# Altium PCB PCB4.PcbDoc
Units mm, origin at the board's own origin, x right, y up, seen from the top; angles counter-clockwise.
Board outline 40 x 40 mm, 2 copper layers (Top Layer, Bottom Layer); 13 components, 21 nets, 53 pads, 13 vias.
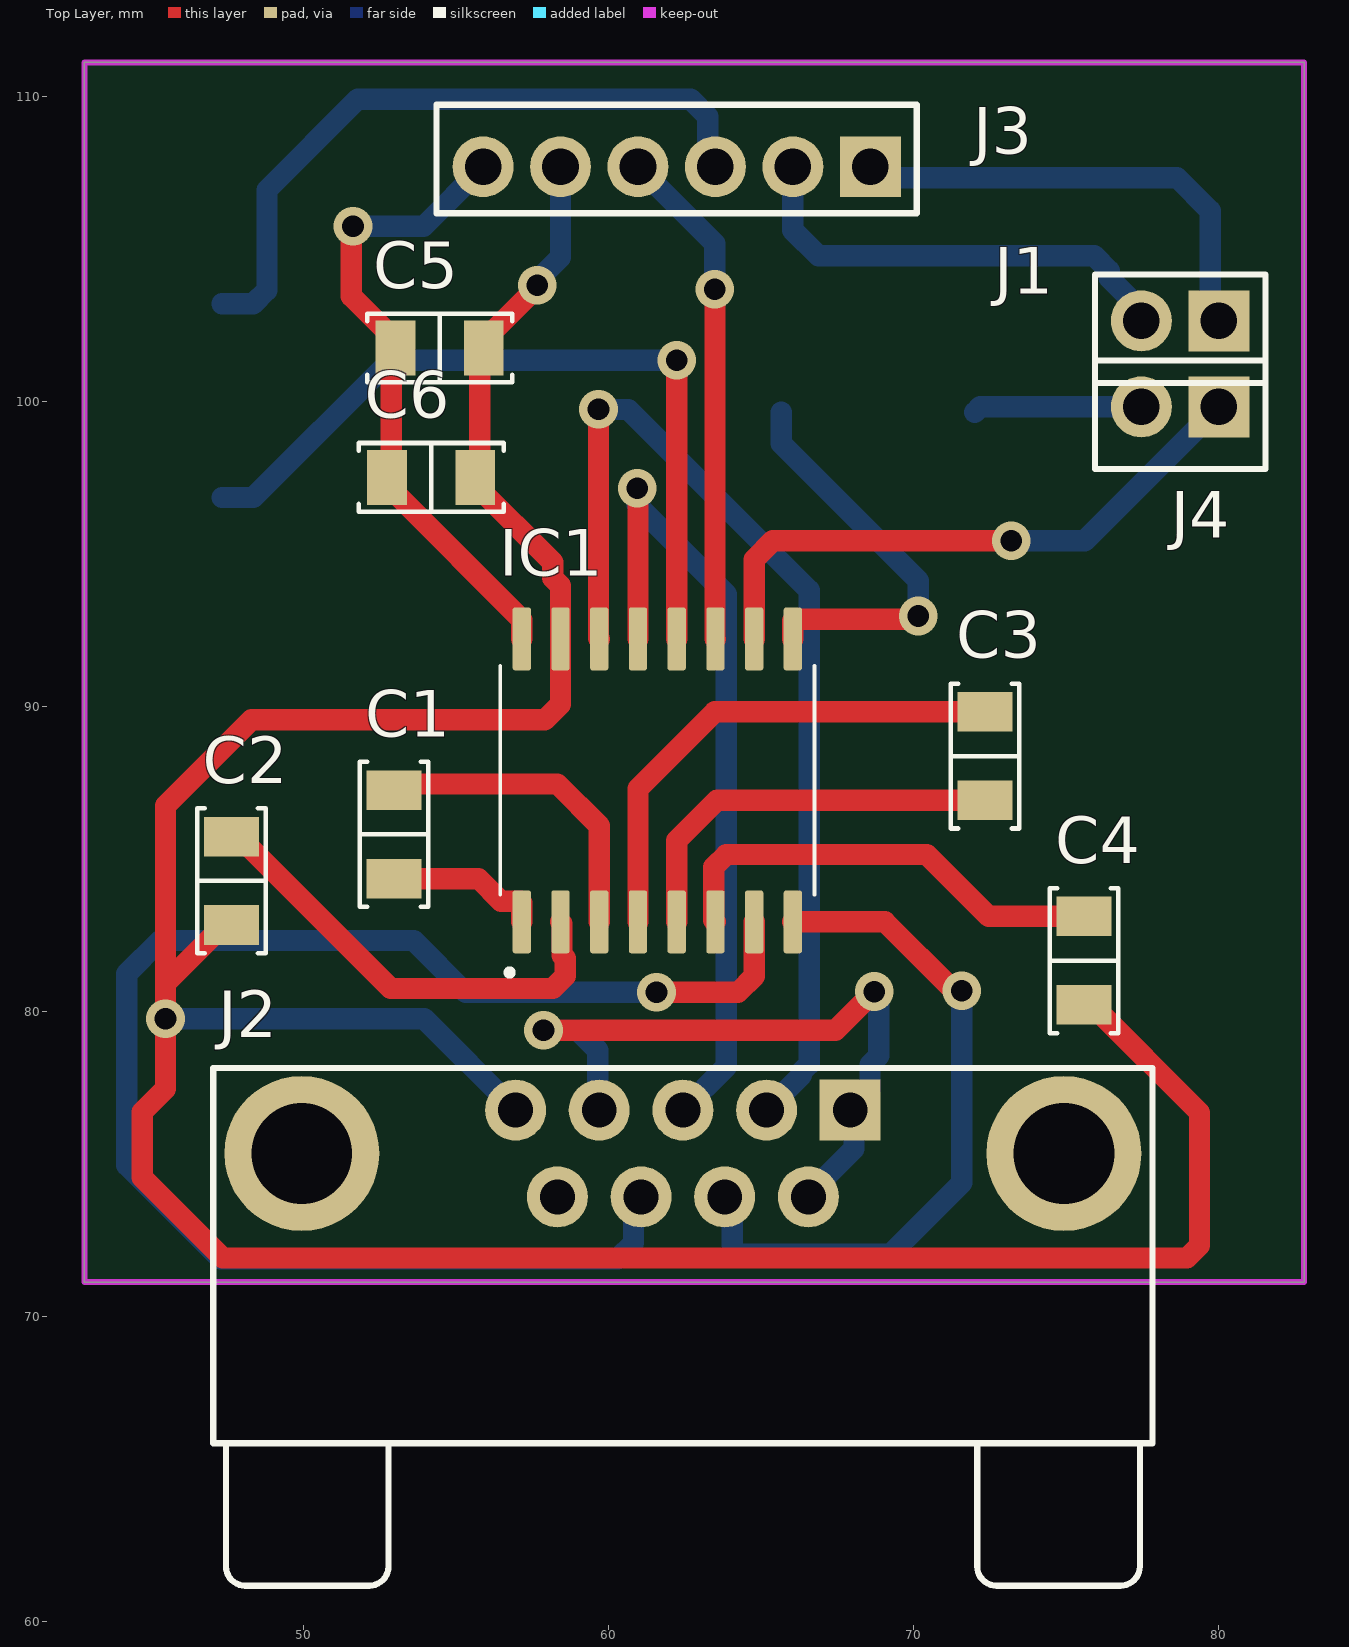
[diagram p0: Top Layer view]
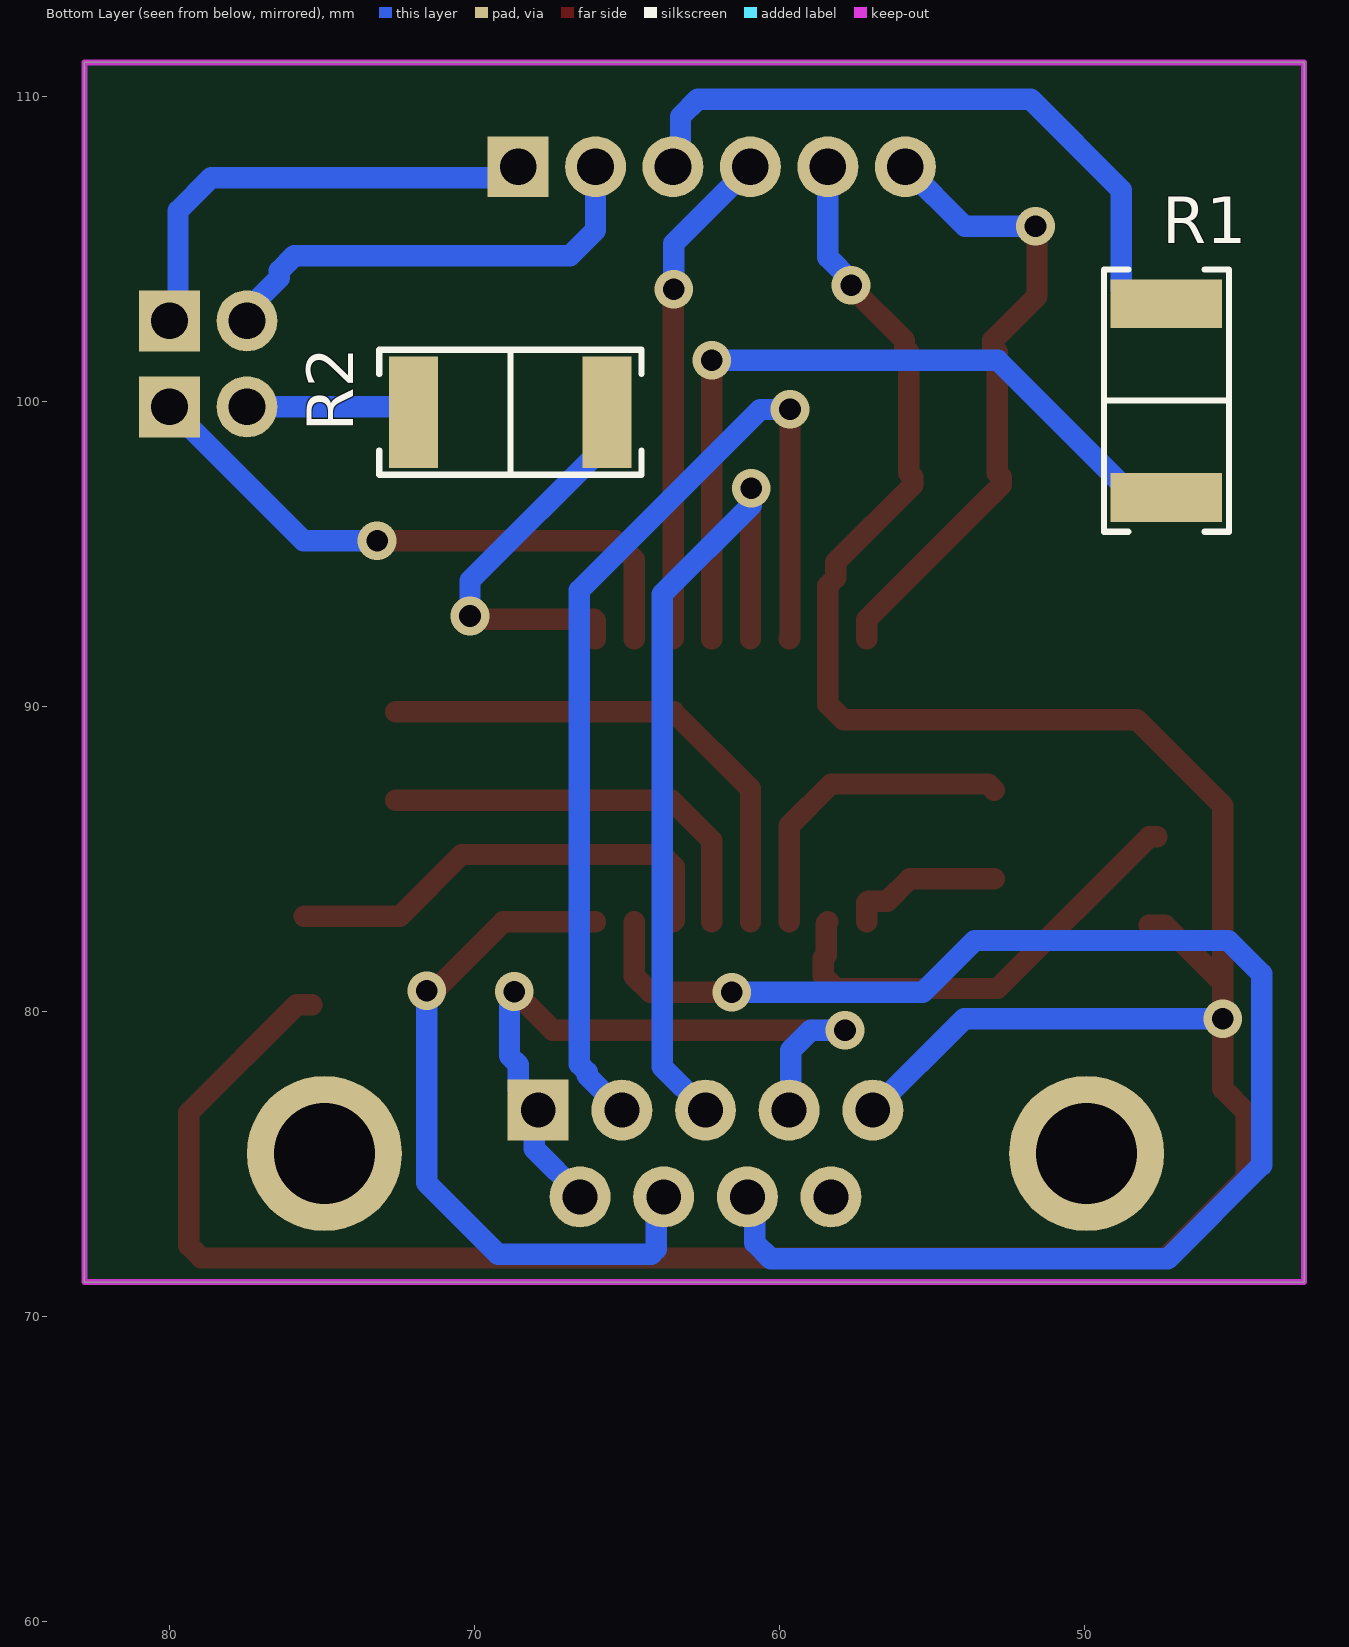
[diagram p1: Bottom Layer view, seen from below]
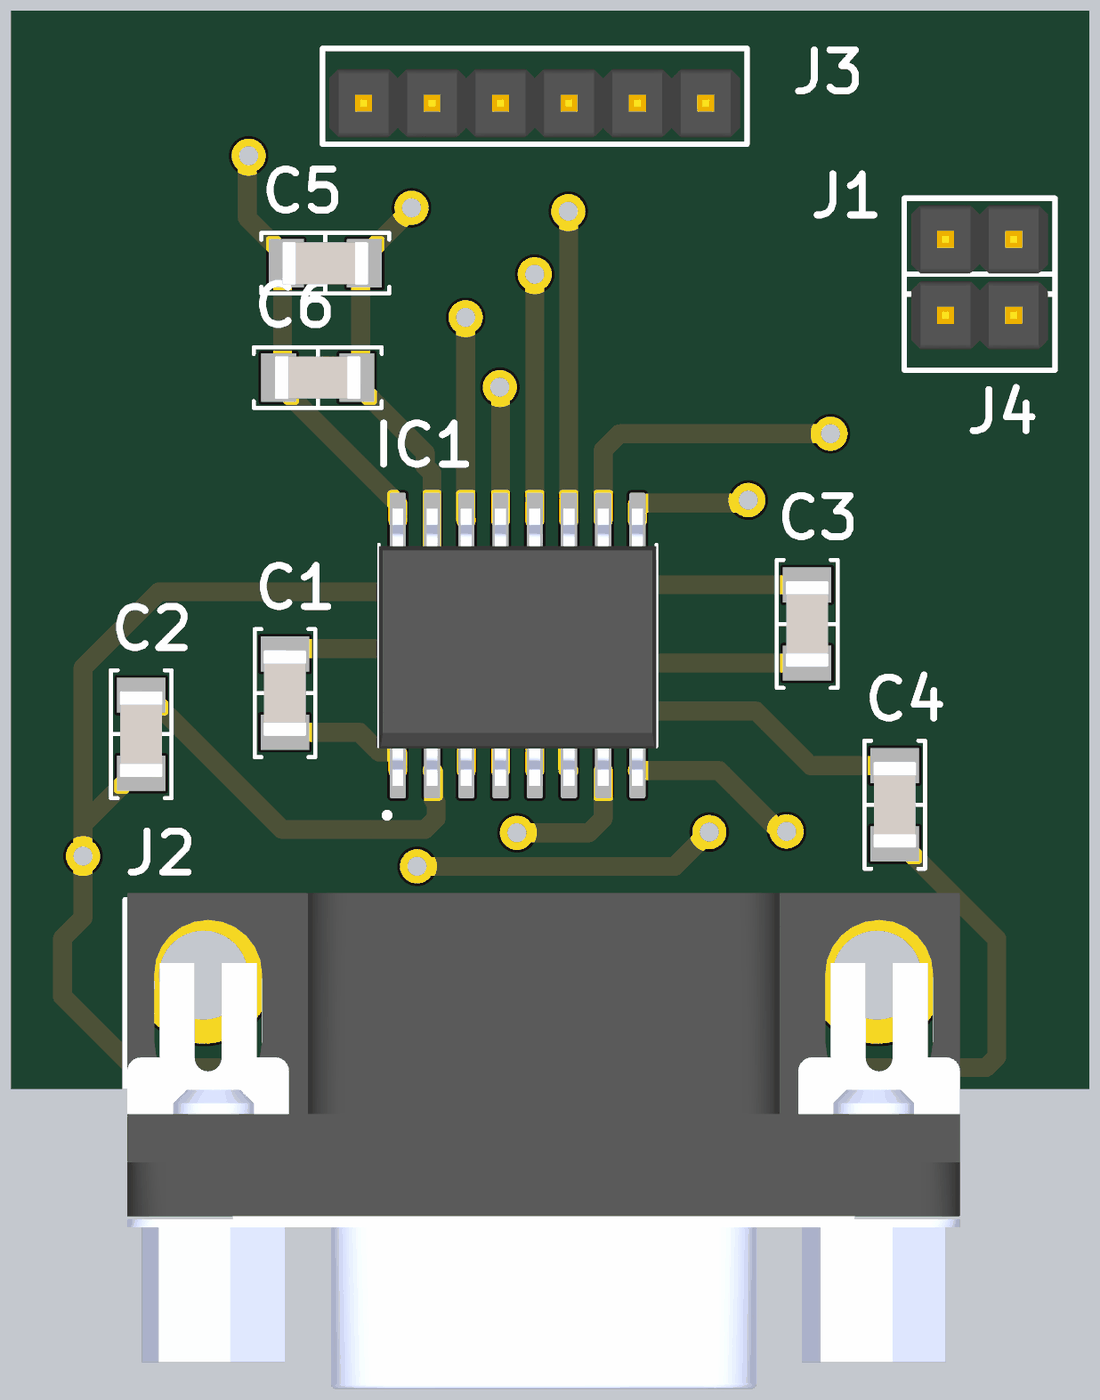
[diagram p2: 3D render of the assembled board from above, using the file's embedded part models]

## Layer stack, top to bottom
Top Solder: solder mask 0.0102, Solder Resist, Dk 3.5
Top Layer: signal copper 0.0356
Dielectric 1: dielectric 0.32, FR-4, Dk 4.8
Bottom Layer: signal copper 0.0356
Bottom Solder: solder mask 0.0102, Solder Resist, Dk 3.5

## Board outline
42.804,71.12 42.804,111.12 82.804,111.12 82.804,71.12

## Design rules (kind name [scope] priority, off if disabled: settings)
Clearance [All] p1: gap=0.254 ignorepadtopadclearanceinfootprint=FALSE except(0: Arc-Hole Track-Hole SMDPad-Hole THPad-Hole Via-Hole Fill-Hole Poly-Hole Region-Hole Text-Hole)
PolygonConnect [All] p1: connectstyle=Relief reliefconductorwidth=0.254 reliefentries=4 polygonreliefangle="90 Angle" airgapwidth=0.254
RoutingVias [All] p1: holewidth=0.711 width=1.27 viastyle="Through Hole" minholewidth=0.711 minwidth=1.27 maxholewidth=0.711 maxwidth=1.27
SolderMaskExpansion [All] p1: expansion=0.102 istentingtop=FALSE
Width [All] p1: maxlimit=1 minlimit=0.254 preferedwidth=0.254
30 further rules are at their usual default settings.

## Components (designator, comment, footprint, x,y, rotation, side; value= is the part's Value field where it differs from the comment)
C1 "0.1µF" "CAP 1206_3216 - 1.8MM" 52.959,85.801 r90 top
C2 "0.1µF" "CAP 1206_3216 - 1.8MM" 47.625,84.277 r90 top
C3 "0.1µF" "CAP 1206_3216 - 1.8MM" 72.339,88.369 r90 top
C4 "0.1µF" "CAP 1206_3216 - 1.8MM" 75.59,81.661 r270 top
C5 "2.2µF" "CAP 1206_3216 - 1.8MM" 54.458,101.752 r0 top
C6 "0.1µF" "CAP 1206_3216 - 1.8MM" 54.178,97.511 r0 top
IC1 "MAX232_SOIC16" SOIC127P1030X265-16N 61.214,87.63 r90 top
J1 "1x2_Header" 1x2_Header 78.994,102.641 r180 top
J2 "DB9" DB9 62.433,75.336 r0 top
J3 "1x6_Header" 1x6_Header 62.484,107.696 r180 top
J4 "1x2_Header" 1x2_Header 78.994,99.822 r180 top
R1 "100 Ohms" "RES 2512_6432" 47.32,100.025 r270 bottom
R2 "100 Ohms" "RES 2512_6432" 68.834,99.644 r180 bottom

## Footprints (in the part's own frame and the unit in brackets; to place one, negate y for a bottom-side part, rotate by r counter-clockwise, add the part's x,y. Pads: shape width x height; smd on the part's side, far side on the other; paste and mask are expansions set on the pad)
1x2_Header [mm]
  rect 2x2 hole 1.2: 1(-1.016,0)
  round 2 hole 1.2: 2(1.524,0)
  silkscreen extent -2.54,-1.52 3.05,2.03, body extent -2.29,-1.27 2.79,1.27, height 10
1x6_Header [mm]
  rect 2x2 hole 1.2: 1(-6.096,0)
  round 2 hole 1.2: 2(-3.556,0) 3(-1.016,0) 4(1.524,0) 5(4.064,0) 6(6.604,0)
  silkscreen extent -7.62,-2.03 8.13,1.52, body extent -7.37,-1.27 7.87,1.27, height 10
"CAP 1206_3216 - 1.8MM" [mm] "Chip Capacitor, 2-Leads, Body 3.25x1.60mm, IPC Medium Density"
  rect 1.3x1.8 smd: 1(-1.45,0) 2(1.45,0)
  silkscreen extent -2.37,-1.12 2.37,1.12, body extent -1.6,-0.8 1.6,0.8, height 1.8
DB9 [mil]
  rect 78.74x78.74 hole 45: 1(216,56)
  round 78.74 hole 45: 2(108,56) 3(0,56) 4(-108,56) 5(-216,56) 6(162,-56) 7(54,-56) 8(-54,-56) 9(-162,-56)
  round 200 hole 130: G1(492,0) G2(-492,0)
  silkscreen extent -606,-558 606,110, body extent -603,-604 613,120, height 533
"RES 2512_6432" [mm] "Chip Resistor, 2-Leads, Body 6.30x3.15mm, IPC Medium Density"
  rect 1.6x3.65 smd: 1(-3.175,0) 2(3.175,0)
  silkscreen extent -4.3,-2.05 4.3,2.05, body extent -3.15,-1.58 3.15,1.57, height 0.7
SOIC127P1030X265-16N [mm]
  rrect25% 2.06x0.6 smd: 1(-4.699,4.064) 2(-4.699,2.794) 3(-4.699,1.524) 4(-4.699,0.254) 5(-4.699,-1.016) 6(-4.699,-2.286) 7(-4.699,-3.556) 8(-4.699,-4.826) 9(4.581,-4.826) 10(4.581,-3.556) 11(4.581,-2.286) 12(4.581,-1.016) 13(4.581,0.254) 14(4.581,1.524) 15(4.581,2.794) 16(4.581,4.064)
  silkscreen extent -6.46,-5.53 3.69,4.77, body extent -5.28,-5.53 5.02,4.77, height 2.65

## Part data
C1 C2 C3 C4 C6: library part C3216C0G2A104J160AC, "CAP CER 0.1UF 100V C0G 1206", Device Package="1206 (3216 Metric)", Manufacturer="TDK Corporation", Operating Temperature="-55°C ~ 125°C", Supplier Part Number 1=445-172677-1-ND, Temperature Coefficient="C0G, NP0", Tolerance=±5%, Voltage - Rated=100V, Applications="General Purpose", Capacitance=0.1µF, ComponentLink1Description=Datasheet, ComponentLink1URL=https://product.tdk.com/info/en/catalog/datasheets/mlcc_commercial_midvoltage_en.pdf?ref_disty=digikey, componentlink2description="DigiKey Link", componentlink2url=http://digikey.com/product-detail/en/tdk-corporation/C3216C0G2A104J160AC/445-172677-1-ND/5023403, Features="Low ESL", lastupdated="2.09.2020 01:05:21", Lifecycle Status=Active, Minimum Order=1, Mounting Type="Surface Mount, MLCC", Package / Case="1206 (3216 Metric)", Packaging=TapeAndReel, Part Number=C3216C0G2A104J160AC, Part Status=Active, partid=22827, price=0.26, Series=C, Size / Dimension="0.126\" L x 0.063\" W (3.20mm x 1.60mm)", Supplier 1=DigiKey, Thickness (Max)="0.071\" (1.80mm)"
C5: library part CGA5L3X8R1E225M160AB, "CAP CER 2.2UF 25V X8R 1206", Device Package="1206 (3216 Metric)", Manufacturer="TDK Corporation", Operating Temperature="-55°C ~ 150°C", Ratings=AEC-Q200, Supplier Part Number 1=445-12992-1-ND, Temperature Coefficient=X8R, Tolerance=±20%, Voltage - Rated=25V, Applications=Automotive, Capacitance=2.2µF, ComponentLink1Description=Datasheet, ComponentLink1URL=https://product.tdk.com/info/en/catalog/datasheets/mlcc_automotive_hightemp_en.pdf?ref_disty=digikey, componentlink2description="DigiKey Link", componentlink2url=http://digikey.com/product-detail/en/tdk-corporation/CGA5L3X8R1E225M160AB/445-12992-1-ND/3954658, Features="High Temperature", lastupdated="2.09.2020 01:05:21", Lifecycle Status=Active, Minimum Order=1, Mounting Type="Surface Mount, MLCC", Package / Case="1206 (3216 Metric)", Packaging=TapeAndReel, Part Number=CGA5L3X8R1E225M160AB, Part Status=Active, partid=22799, price=0.20, Series=CGA, Size / Dimension="0.126\" L x 0.063\" W (3.20mm x 1.60mm)", Supplier 1=DigiKey, Thickness (Max)="0.071\" (1.80mm)"
R1 R2: library part RC2512FK-07100RL, "RES SMD 100 OHM 1% 1W 2512", Device Package="2512 (6432 Metric)", Manufacturer=Yageo, Operating Temperature="-55°C ~ 155°C", Power (Watts)=1W, Supplier Device Package=2512, Supplier Part Number 1=YAG3387CT-ND, Temperature Coefficient=±100ppm/°C, Tolerance=±1%, ComponentLink1Description=Datasheet, ComponentLink1URL=https://www.yageo.com/upload/media/product/productsearch/datasheet/rchip/PYu-RC_Group_51_RoHS_L_10.pdf, componentlink2description="DigiKey Link", componentlink2url=http://digikey.com/product-detail/en/yageo/RC2512FK-07100RL/YAG3387CT-ND/5962209, Composition="Thick Film", Features="Moisture Resistant", Height - Seated (Max)="0.026\" (0.65mm)", lastupdated="2.09.2020 01:27:03", Lifecycle Status=Active, Minimum Order=1, Number of Terminations=2, Package / Case="2512 (6432 Metric)", Packaging=TapeAndReel, Part Number=RC2512FK-07100RL, Part Status=Active, price=0.05, Resistance="100 Ohms", Series=RC, Size / Dimension="0.250\" L x 0.122\" W (6.35mm x 3.10mm)", Supplier 1=DigiKey

## Via types
v1: diameter 1.27, hole 0.711, Top Layer to Bottom Layer, 13 vias

## Nets (pads, with @x,y where several pads share a name; then routed paths per layer and width w, separated by ;. In a path a pad name is that pad's centre, name@x,y a point inside that pad or via, vN(x,y) a via of type N, cw(c..) or ccw(c..) an arc to the next point about the centre after c; other vN are vias at no path point)
C1+: C1.1 IC1.1 | length 5.1
  Top Layer w0.7: C1.1 55.73,84.351 56.47,83.611 57.1,83.611 57.15,83.561 IC1.1
C1-: C1.2 IC1.3 | length 10.5
  Top Layer w0.7: C1.2 53.16,87.452 58.318,87.452 59.69,86.081 IC1.3
C2+: C3.2 IC1.4 | length 17
  Top Layer w0.7: IC1.4 60.96,87.3 63.479,89.819 C3.2 C3.2@72.589,89.819
C2-: C3.1 IC1.5 | length 13.6
  Top Layer w0.7: IC1.5 62.23,85.598 63.551,86.919 C3.1 C3.1@72.589,86.919
DIN1: IC1.11 J3.4 | length 16.5
  Top Layer w0.7: v1(63.475,103.683) 63.487,103.67 63.487,92.224 IC1.11
  Bottom Layer w0.7: J3.4 63.475,105.181 v1(63.475,103.683)
DIN2: IC1.10 J4.1 | length 19.9
  Top Layer w0.7: IC1.10 64.77,94.818 65.38,95.428 v1(73.203,95.428)
  Bottom Layer w0.7: v1(73.203,95.428) 75.616,95.428 J4.1
DOUT1: IC1.14 J2.2 | length 34.5
  Top Layer w0.7: v1(59.665,99.746) 59.665,92.236 IC1.14
  Bottom Layer w0.7: v1(59.665,99.746) 59.673,99.737 60.639,99.737 66.573,93.802 66.573,78.267 66.316,78.009 66.316,77.898 J2.2
DOUT2: IC1.7 J2.8 | length 49.7
  Top Layer w0.7: v1(61.57,80.62) 64.24,80.62 64.77,81.15 IC1.7
  Bottom Layer w0.7: J2.8 60.813,73.665 60.813,72.399 60.296,71.882 47.269,71.882 44.196,74.955 44.196,81.229 45.288,82.321 53.606,82.321 55.308,80.62 v1(61.57,80.62)
GND: C2.1 C4.2 C5.2 C6.2 IC1.15 J2.5 J3.5 | length 108.5
  Top Layer w0.7: C2.1@47.875,82.827 C2.1 47.375,82.827 45.466,80.918 ; v1(57.658,103.81) 57.658,103.753 55.908,102.002 C5.2 55.768,101.613 55.768,97.65 C6.2 55.628,97.261 58.166,94.723 58.166,94.209 58.42,93.955 IC1.15 58.42,90.072 57.908,89.56 48.285,89.56 45.466,86.741 45.466,80.918 ; C4.2@75.34,80.211 C4.2 75.84,80.211 79.375,76.676 79.375,72.317 78.965,71.907 47.346,71.907 44.704,74.549 44.704,76.694 45.466,77.456 v1(45.466,79.756) 45.466,80.918
  Bottom Layer w0.7: v1(45.466,79.756) 53.95,79.756 J2.5 ; v1(57.658,103.81) 57.658,103.964 58.42,104.726 J3.5
NetJ1_1: J1.1 J3.1 | length 15.5
  Bottom Layer w0.7: J3.1 68.936,107.34 78.638,107.34 79.731,106.248 79.731,102.921 J1.1
NetJ1_2: J1.2 J3.2 | length 15.1
  Bottom Layer w0.7: J3.2 66.04,105.613 66.878,104.775 75.921,104.775 76.416,104.28 76.416,104.048 77.47,102.993 J1.2
NetJ2_1: J2.1 J2.4 J2.6 | length 23.6
  Top Layer w0.7: v1(57.861,79.375) 67.437,79.375 v1(68.707,80.645)
  Bottom Layer w0.7: v1(57.861,79.375) 58.983,79.375 59.639,78.719 59.639,76.81 J2.4 ; J2.6@66.797,74.163 J2.6 66.548,73.99 68.047,75.489 68.047,76.632 J2.1 68.57,77.409 68.57,78.247 68.859,78.537 68.859,80.493 v1(68.707,80.645)
NetJ3_3: J3.3 R1.1 | length 22.6
  Bottom Layer w0.7: R1.1 48.345,103.2 48.795,103.65 48.795,106.936 51.765,109.906 62.687,109.906 63.251,109.342 63.251,107.945 J3.3
NetJ4_2: J4.2 R2.1 | length 5.5
  Bottom Layer w0.7: R2.1 72.187,99.822 J4.2
RIN1: IC1.13 J2.3 | length 27.1
  Top Layer w0.7: v1(60.935,97.155) 60.96,97.13 IC1.13
  Bottom Layer w0.7: v1(60.935,97.155) 60.935,96.596 63.856,93.675 63.856,78.181 J2.3
RIN2: IC1.8 J2.7 | length 23.2
  Top Layer w0.7: IC1.8 69.063,82.931 71.323,80.67 v1(71.577,80.67)
  Bottom Layer w0.7: J2.7 64.054,73.665 64.054,72.196 64.215,72.034 69.24,72.034 71.577,74.371 v1(71.577,80.67)
ROUT1: IC1.12 R1.2 | length 25.9
  Top Layer w0.7: IC1.12 v1(62.23,101.346)
  Bottom Layer w0.7: R1.2 48.345,96.85 52.841,101.346 v1(62.23,101.346)
ROUT2: IC1.9 R2.2 | length 13.3
  Top Layer w0.7: IC1.9 66.04,92.805 66.09,92.855 70.046,92.855 v1(70.155,92.964)
  Bottom Layer w0.7: R2.2 65.659,98.619 70.155,94.123 v1(70.155,92.964)
V+: C2.2 IC1.2 | length 15
  Top Layer w0.7: C2.2 47.875,85.727 52.856,80.747 58.162,80.747 58.572,81.157 58.572,81.737 58.47,81.839 58.47,82.881 IC1.2
V-: C4.1 IC1.6 | length 15
  Top Layer w0.7: 63.449,84.151 63.449,84.731 63.859,85.141 70.434,85.141 72.464,83.111 C4.1 ; 63.45,84.15 63.45,82.981 IC1.6
VCC: C5.1 C6.1 IC1.16 J3.6 | length 21.2
  Top Layer w0.7: v1(51.613,105.74) 51.562,105.69 51.562,103.448 53.008,102.002 C5.1 52.868,101.613 52.868,97.65 C6.1 52.728,97.261 53.028,96.961 53.03,96.961 57.15,92.841 IC1.16
  Bottom Layer w0.7: v1(51.613,105.74) 53.924,105.74 J3.6
pads on no net: J2.9 J2.G1 J2.G2

## Keep-outs
Keep-Out Layer:
  the board outline again, w0.2